# EAGLE board rs232_mon (EAGLE 9.6.2)
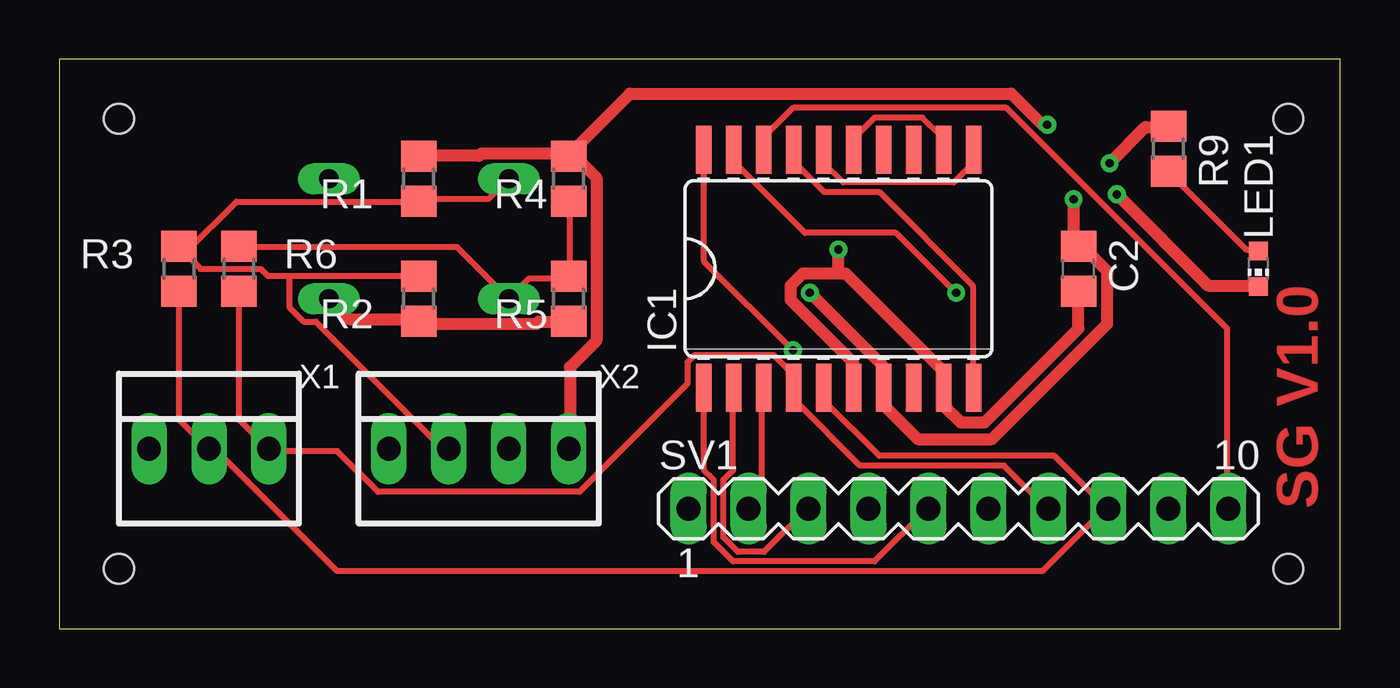
[diagram p0: board, top side]
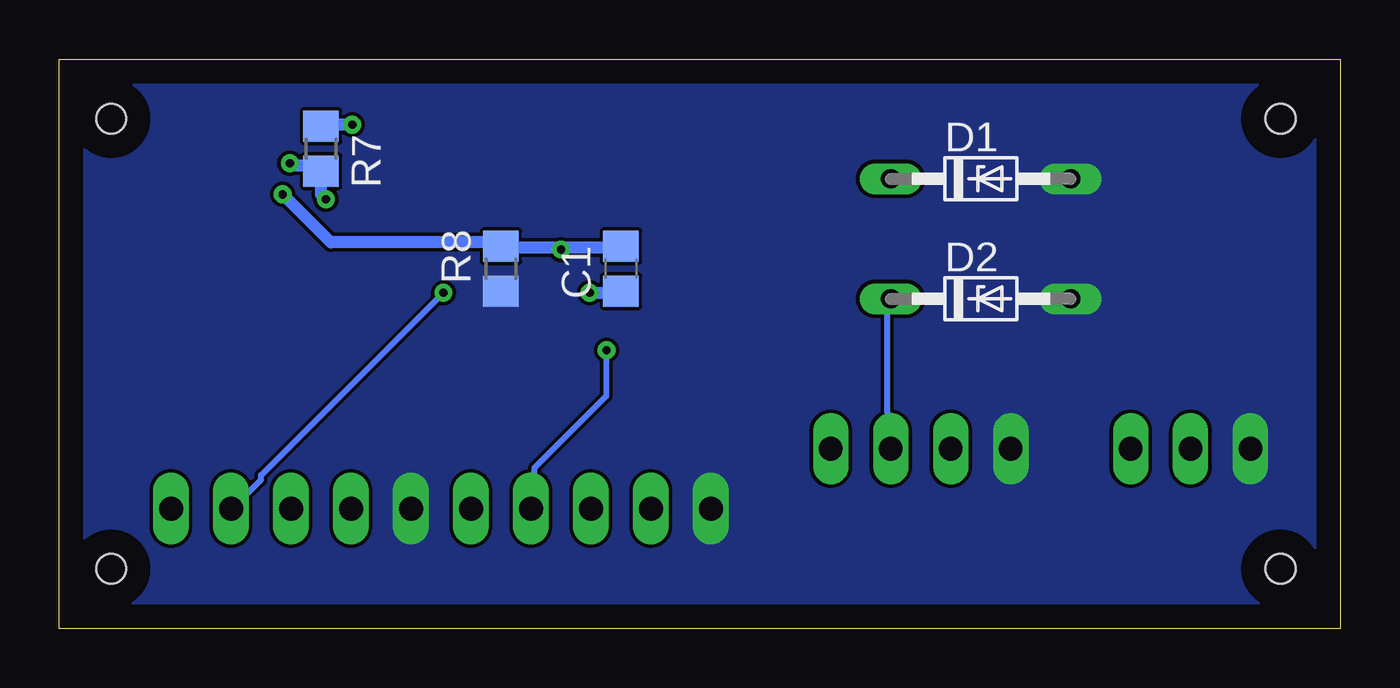
[diagram p1: board, bottom side, seen from below]

Size 54.28 x 24.12 mm. Coordinates in mm from the lower left corner, seen from the top.
Outline: 0,0 54.28,0 54.28,24.12 0,24.12 0,0
Copper layers (1*16): Top 0.035mm / dielectric 1.5mm / Bottom 0.035mm
Design rules "default": minimum track width 6mil, minimum drill 0.35mm, track to track 6mil, track to pad 6mil, pad to pad 6mil, via to via 6mil, smd to smd 6mil, copper to edge 40mil, drill to drill 6mil, minimum pad ring 10mil, minimum via ring 8mil, stop-mask expansion 4mil, vias tented up to drill 0mil, thermal gap 10mil
Net classes: 0 default: width 0.254 mm; 1 current: width 0.508 mm
Holes 1.27 mm at 2.54,21.59 52.07,21.59 52.07,2.54 2.54,2.54

## Footprints (pad centres in the part's own frame; a part is rotated, then mirrored left to right if it is on the bottom)
C0805 = smd 1.3 x 1.5: 1 -0.95,0; 2 0.95,0
DO34Z7 = drill 0.813 long: A 3.81,0; C -3.81,0
SO20L = smd 0.66 x 2.032: 1 -5.715,-5.029; 2 -4.445,-5.029; 3 -3.175,-5.029; 4 -1.905,-5.029; 5 -0.635,-5.029; 6 0.635,-5.029; 7 1.905,-5.029; 8 3.175,-5.029; 9 4.445,-5.029; 10 5.715,-5.029; 11 5.715,5.029; 12 4.445,5.029; 13 3.175,5.029; 14 1.905,5.029; 15 0.635,5.029; 16 -0.635,5.029; 17 -1.905,5.029; 18 -3.175,5.029; 19 -4.445,5.029; 20 -5.715,5.029
CHIP-LED0603 = smd 0.8 x 0.8: A 0,-0.75; C 0,0.75
R0805 = smd 1.3 x 1.5: 1 -0.95,0; 2 0.95,0
MA10-1 = drill 1.016 long: 1 -11.43,0; 2 -8.89,0; 3 -6.35,0; 4 -3.81,0; 5 -1.27,0; 6 1.27,0; 7 3.81,0; 8 6.35,0; 9 8.89,0; 10 11.43,0
22-23-2031 = drill 1 long: 1 -2.54,0; 2 0,0; 3 2.54,0
22-23-2041 = drill 1 long: 1 -3.81,0; 2 -1.27,0; 3 1.27,0; 4 3.81,0

## Placement (x,y rotation side)
C1  0.1uf  [C0805]  30.48,15.24 90 bottom
C2  10uf  [C0805]  43.18,15.24 270 top
D1  5.6V  [DO34Z7]  15.24,19.05 0 bottom
D2  5.6V  [DO34Z7]  15.24,13.97 0 bottom
IC1  MAX203ECWP  [SO20L]  33.02,15.24 0 top
LED1  POWER  [CHIP-LED0603]  50.8,15.24 180 top
R1  12.1k  [R0805]  15.24,19.05 90 top
R2  12.1k  [R0805]  15.24,13.97 90 top
R3  86.6k  [R0805]  5.08,15.24 90 top
R4  12.1k  [R0805]  21.59,19.05 270 top
R5  12.1k  [R0805]  21.59,13.97 270 top
R6  86.6k  [R0805]  7.62,15.24 270 top
R7  0ohm  [R0805]  43.18,20.32 270 bottom
R8  0ohm  [R0805]  35.56,15.24 90 bottom
R9  1k  [R0805]  46.99,20.32 270 top
SV1  SERIAL BUS  [MA10-1]  38.1,5.08 0 top
X1  RS232 LINES  [22-23-2031]  6.35,7.62 0 top
X2  ADC POWER  [22-23-2041]  17.78,7.62 0 top

## Library data of the parts
C1 C2 = rcl; SPICEPREFIX: C
D1 D2 = diode
IC1 = maxim; MPN: MAX203ECWP+G36; OC_FARNELL: 1224204; OC_NEWARK: 89K3435
LED1 = led
R1-R9 = rcl; SPICEPREFIX: R
SV1 = con-lstb; OC_FARNELL: unknown; OC_NEWARK: unknown
X1 = con-molex; MF: MOLEX; MPN: 22-23-2031; OC_FARNELL: 1462950; OC_NEWARK: 30C0862
X2 = con-molex; MF: MOLEX; MPN: 22-23-2041; OC_FARNELL: 1462920; OC_NEWARK: 38C0355

## Nets
EQRX: IC1.20 SV1.4
EQTX: IC1.1 SV1.5
GND [current]: C1.2 C2.2 IC1.6 IC1.9 LED1.C R8.2
MCURX: IC1.3 SV1.2
MCUTX: IC1.2 SV1.3
N$1: D1.C R1.1 R2.2 R3.2 X2.2
N$2: D2.C R4.2 R5.1 R6.1 X2.3
N$3: LED1.A R9.2
N$5: IC1.10 IC1.17
N$6: IC1.11 IC1.16
N$7: IC1.12 IC1.15
RS232EQRX: IC1.19 SV1.9
RS232EQTX: IC1.18 SV1.10
RS232RX: IC1.4 R6.2 SV1.7 X1.3
RS232TX: IC1.5 R3.1 SV1.8 X1.2
VCC [current]: C1.1 C2.1 IC1.7 R7.2 R9.1
VDD [current]: R1.2 R4.1 R7.1 X2.4
VSS [current]: D1.A D2.A R2.1 R5.2 R8.1 SV1.1 SV1.6 X1.1 X2.1

## Tracks (layer width: path | path; a pad name or v marks a point on that pad's centre or on a via)
EQRX  (via drill 0.35)
  Top 0.254: v31.09,11.79 27.33,15.55 27.33,20.22 IC1.20
  Bottom 0.254: v31.09,11.79 31.09,9.86 34.14,6.81 34.14,6.6 34.24,6.5 34.24,5.08 SV1.4
EQTX
  Top 0.254: IC1.1 27.33,10.16 27.33,6.71 27.74,6.3 27.74,3.66 28.55,2.84 34.54,2.84 36.78,5.08 SV1.5
GND  (via drill 0.35)
  Top 0.508: C2.2 43.18,12.7 39.22,8.74 38.2,8.74 37.49,9.45 37.49,10.16 IC1.9 37.49,10.46 37.49,10.87 33.33,15.04 33.02,15.04 | 33.02,15.04 31.5,15.04 30.99,14.53 30.99,13.92 33.63,11.28 33.63,10.26 IC1.6 | 33.02,15.04 v33.02,16.05 | v44.81,18.39 48.67,14.53 50.8,14.53 LED1.C
  Bottom 0.508: 33.02,16.15 35.56,16.15 R8.2 35.66,16.36 42.77,16.36 v44.81,18.39 | 33.02,16.15 30.48,16.15 C1.2 | v33.02,16.05 33.02,16.15
MCURX
  Top 0.254: IC1.3 29.77,10.16 29.77,5.59 29.26,5.08 SV1.2
MCUTX
  Top 0.254: IC1.2 28.55,10.16 28.55,6.71 28.14,6.3 28.14,3.86 28.75,3.25 29.87,3.25 31.7,5.08 SV1.3
N$1
  Top 0.254: D1.C 18.19,18.19 15.24,18.19 R1.1 15.14,18.09 7.52,18.09 5.38,15.95 R3.2 5.08,16.15 5.99,15.24 8.53,15.24 8.84,14.94 9.75,14.94 | 9.75,14.94 15.24,14.94 R2.2 | X2.2 16.26,7.62 10.87,13.01 10.36,13.01 9.75,13.61 9.75,14.94
N$2
  Top 0.254: R6.1 7.62,16.15 16.87,16.15 D2.C 19.91,14.83 21.54,14.83 R5.1 21.64,15.04 21.64,18.09 R4.2
  Bottom 0.254: D2.C 19.2,13.82 19.2,9.14 19.1,9.04 19.1,7.62 X2.3
N$3
  Top 0.254: LED1.A 50.8,16.05 50.29,16.05 47.04,19.3 R9.2
N$5
  Top 0.254: IC1.10 38.71,10.26 38.71,14.53 34.75,18.49 32.41,18.49 31.19,19.71 31.19,20.22 IC1.17
N$6
  Top 0.254: IC1.16 32.41,20.22 32.41,19.71 33.22,18.9 37.9,18.9 38.71,19.71 38.71,20.22 IC1.11
N$7
  Top 0.254: IC1.15 33.73,20.32 33.73,20.83 34.54,21.64 36.58,21.64 37.39,20.83 37.39,20.32 IC1.12
RS232EQRX  (via drill 0.35)
  Top 0.254: v38,14.22 35.46,16.76 31.6,16.76 28.65,19.71 28.65,20.22 IC1.19
  Bottom 0.254: v38,14.22 45.72,6.5 45.72,6.3 46.94,5.08 SV1.9
RS232EQTX
  Top 0.254: IC1.18 29.87,20.32 29.87,20.83 31.09,22.05 40.13,22.05 49.48,12.7 49.48,5.08 SV1.10
RS232RX
  Top 0.254: R6.2 7.62,8.84 8.84,7.62 X1.3 8.94,7.52 11.79,7.52 13.51,5.79 22.05,5.79 26.62,10.36 26.62,11.28 26.92,11.58 30.28,11.58 31.09,10.77 31.09,10.26 IC1.4 31.19,10.16 31.19,9.65 33.93,6.91 40.03,6.91 41.86,5.08 SV1.7
RS232TX
  Top 0.254: R3.1 5.08,8.84 6.3,7.62 X1.2 6.4,7.52 6.71,7.52 11.79,2.44 41.66,2.44 44.3,5.08 SV1.8 44.4,5.08 42.16,7.32 34.75,7.32 32.41,9.65 32.41,10.16 IC1.5
VCC  (via drill 0.35)
  Top 0.508: v31.8,14.22 34.85,11.18 34.85,10.26 IC1.7 34.85,9.96 34.85,9.55 36.37,8.03 39.52,8.03 44.4,12.9 44.4,15.14 43.38,16.15 43.18,16.15 C2.1 42.98,16.26 v42.98,18.19 | v44.5,19.71 46.02,21.23 46.94,21.23 R9.1
  Bottom 0.508: v31.8,14.22 30.48,14.22 C1.1 | v42.98,18.19 43.18,18.39 R7.2 43.28,19.61 44.4,19.61 v44.5,19.71
VDD  (via drill 0.35)
  Top 0.508: R1.2 15.24,20.02 17.78,20.02 17.88,20.12 21.44,20.12 21.54,20.02 R4.1 | v41.86,21.34 41.66,21.34 40.34,22.66 24.18,22.66 21.74,20.22 R4.1 | X2.4 21.64,7.62 21.64,11.07 22.76,12.19 22.76,19.1 21.84,20.02 R4.1
  Bottom 0.508: v41.86,21.34 43.18,21.34 R7.1
VSS
  Top 0.508: D2.A 12.29,13.11 15.24,13.11 R2.1 15.44,12.9 20.22,12.9 20.32,13.01 21.54,13.01 R5.2
  pour Bottom (no thermals): 0,24.13 54.61,24.13 54.61,0 0,0

## Text on the board
Top: SG V1.0